# EAGLE board mini (EAGLE 9.7.0)
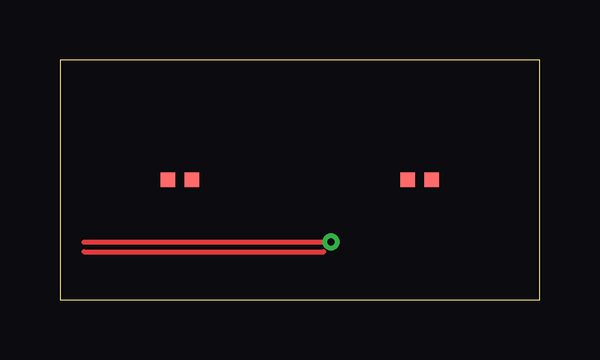
[diagram p0: board, top side]
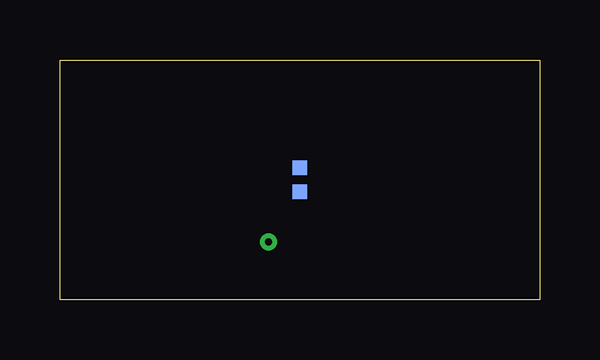
[diagram p1: board, bottom side, seen from below]

Size 20 x 10 mm. Coordinates in mm from the lower left corner, seen from the top.
Outline: 0,0 20,0 20,10 0,10 0,0
Copper layers (1*16): Top 0.035mm / Bottom 0.035mm
Net classes: 1 USB: width 0.2 mm, drill 0.3 mm

## Footprints (pad centres in the part's own frame; a part is rotated, then mirrored left to right if it is on the bottom)
R0402 = smd 0.6 x 0.6: 1 -0.5,0; 2 0.5,0

## Placement (x,y rotation side)
R1  10k  [R0402]  5,5 0 top
R2  10k  [R0402]  10,5 90 bottom
R10  1k  [R0402]  15,5 0 top

## Library data of the parts
R1 R2 = TESTLIB; JLCPCB: C25744
R10 = TESTLIB

## Nets
D_N [USB]: R1.2
D_P [USB]: R1.1

## Tracks (layer width: path | path; a pad name or v marks a point on that pad's centre or on a via)
D_N  (via drill 0.3)
  Top 0.2: 1,2.4 v11.3,2.4
D_P
  Top 0.2: 1,2 11,2